# Altium PCB Business_Card.PcbDoc (part 1 of 2)
Units mm, origin at the board's own origin, x right, y up, seen from the top; angles counter-clockwise.
Board outline 85 x 55 mm, 4 copper layers (Top Layer (RF), Inner1 (GND), Inner2 (Signal), Bottom Layer (VCC)), stack 0.786 mm thick; 94 components, 61 nets, 338 pads, 147 vias.
Unrouted connection lines stored in the file: 1.
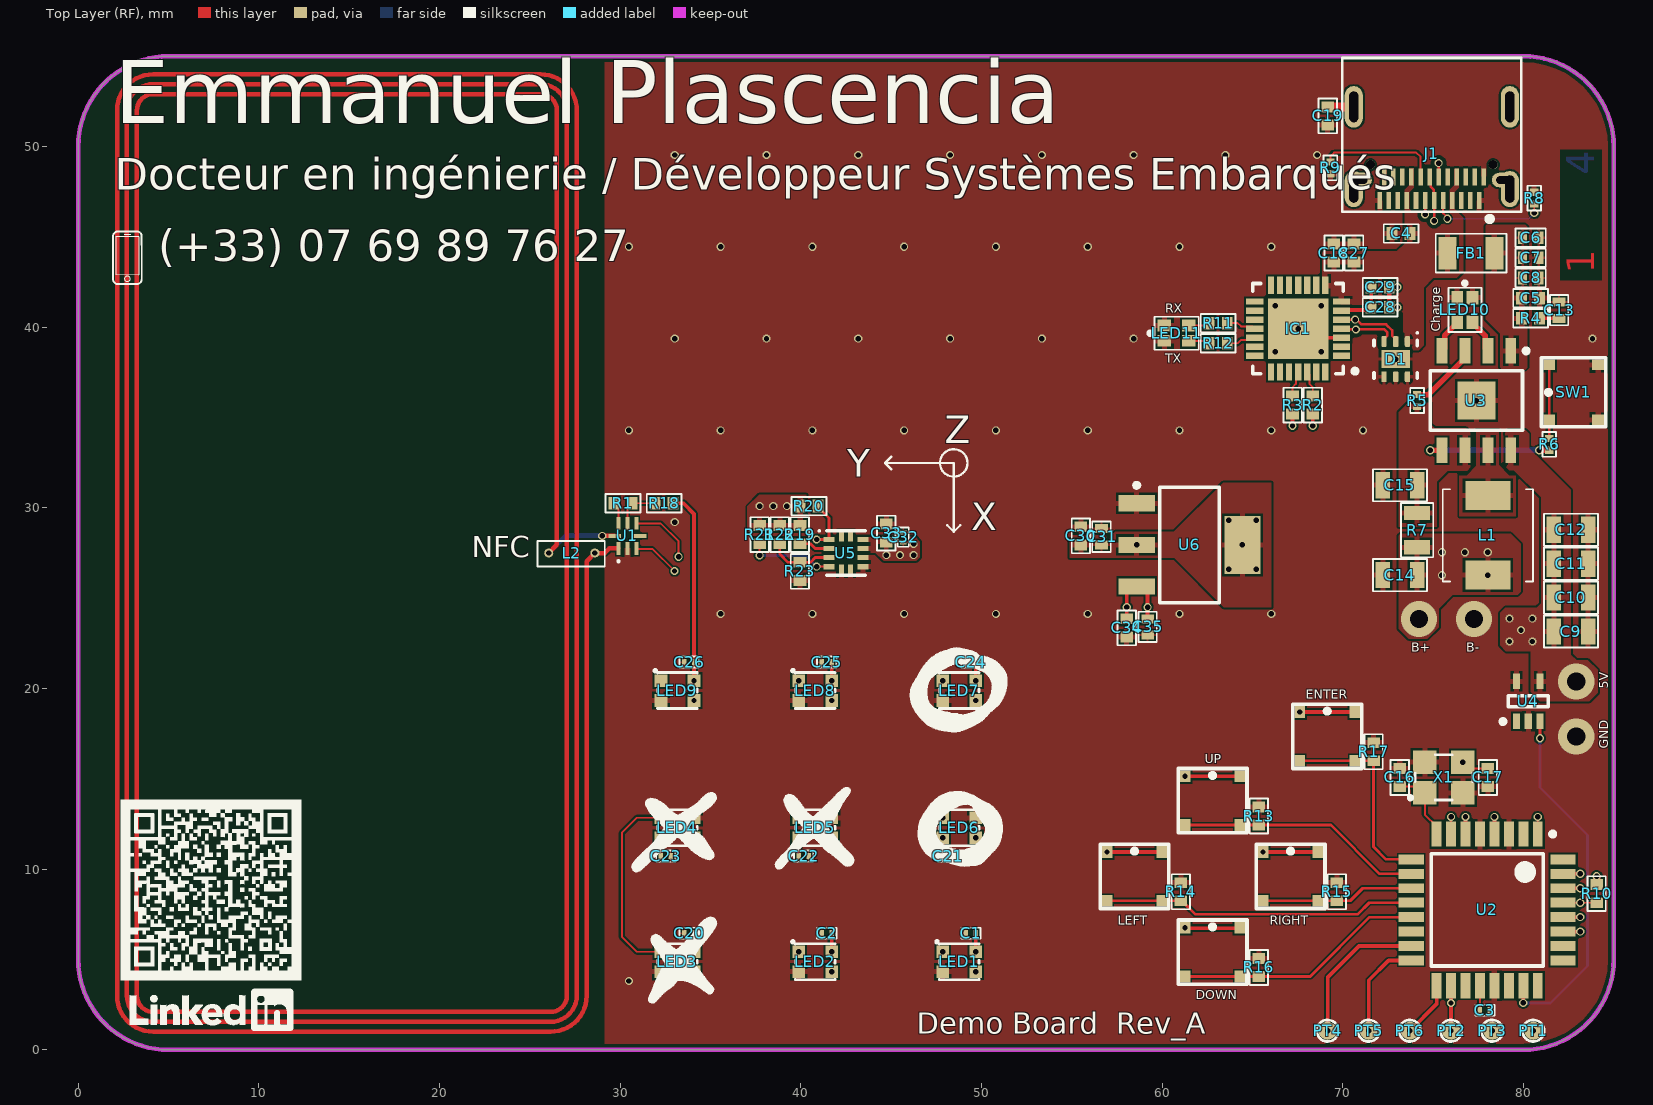
[diagram p0: Top Layer (RF) view]
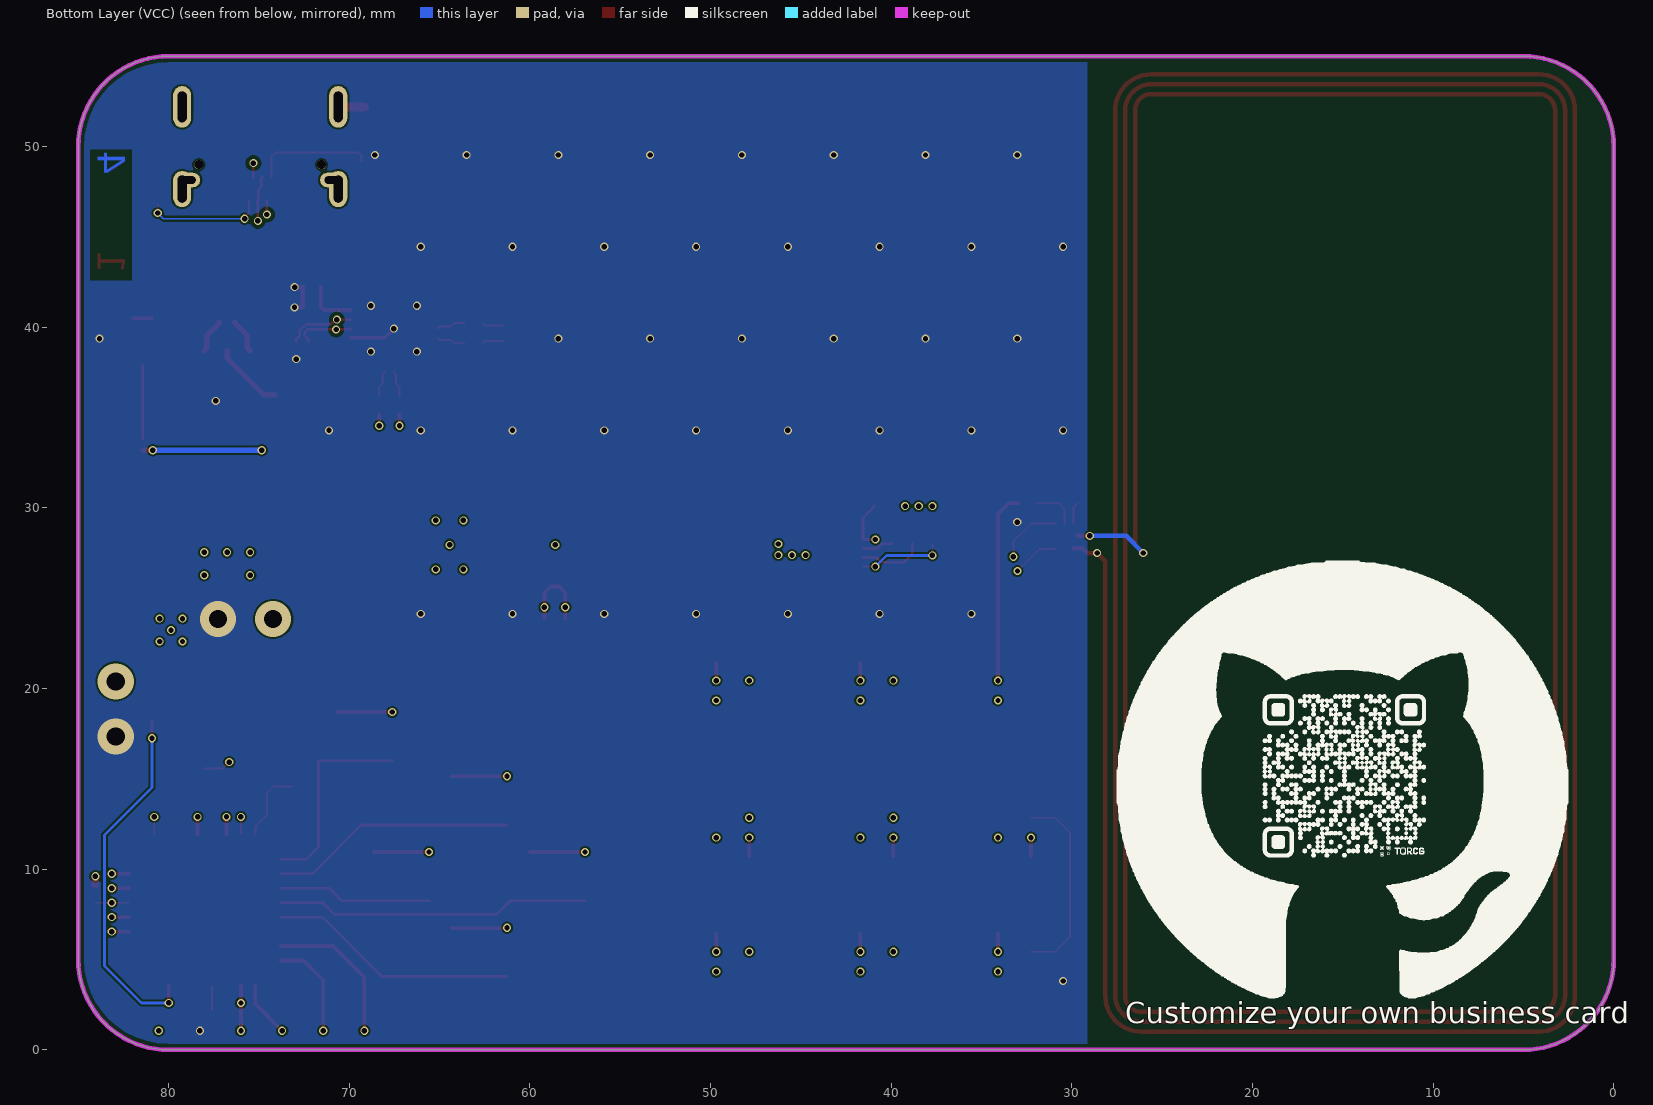
[diagram p1: Bottom Layer (VCC) view, seen from below]
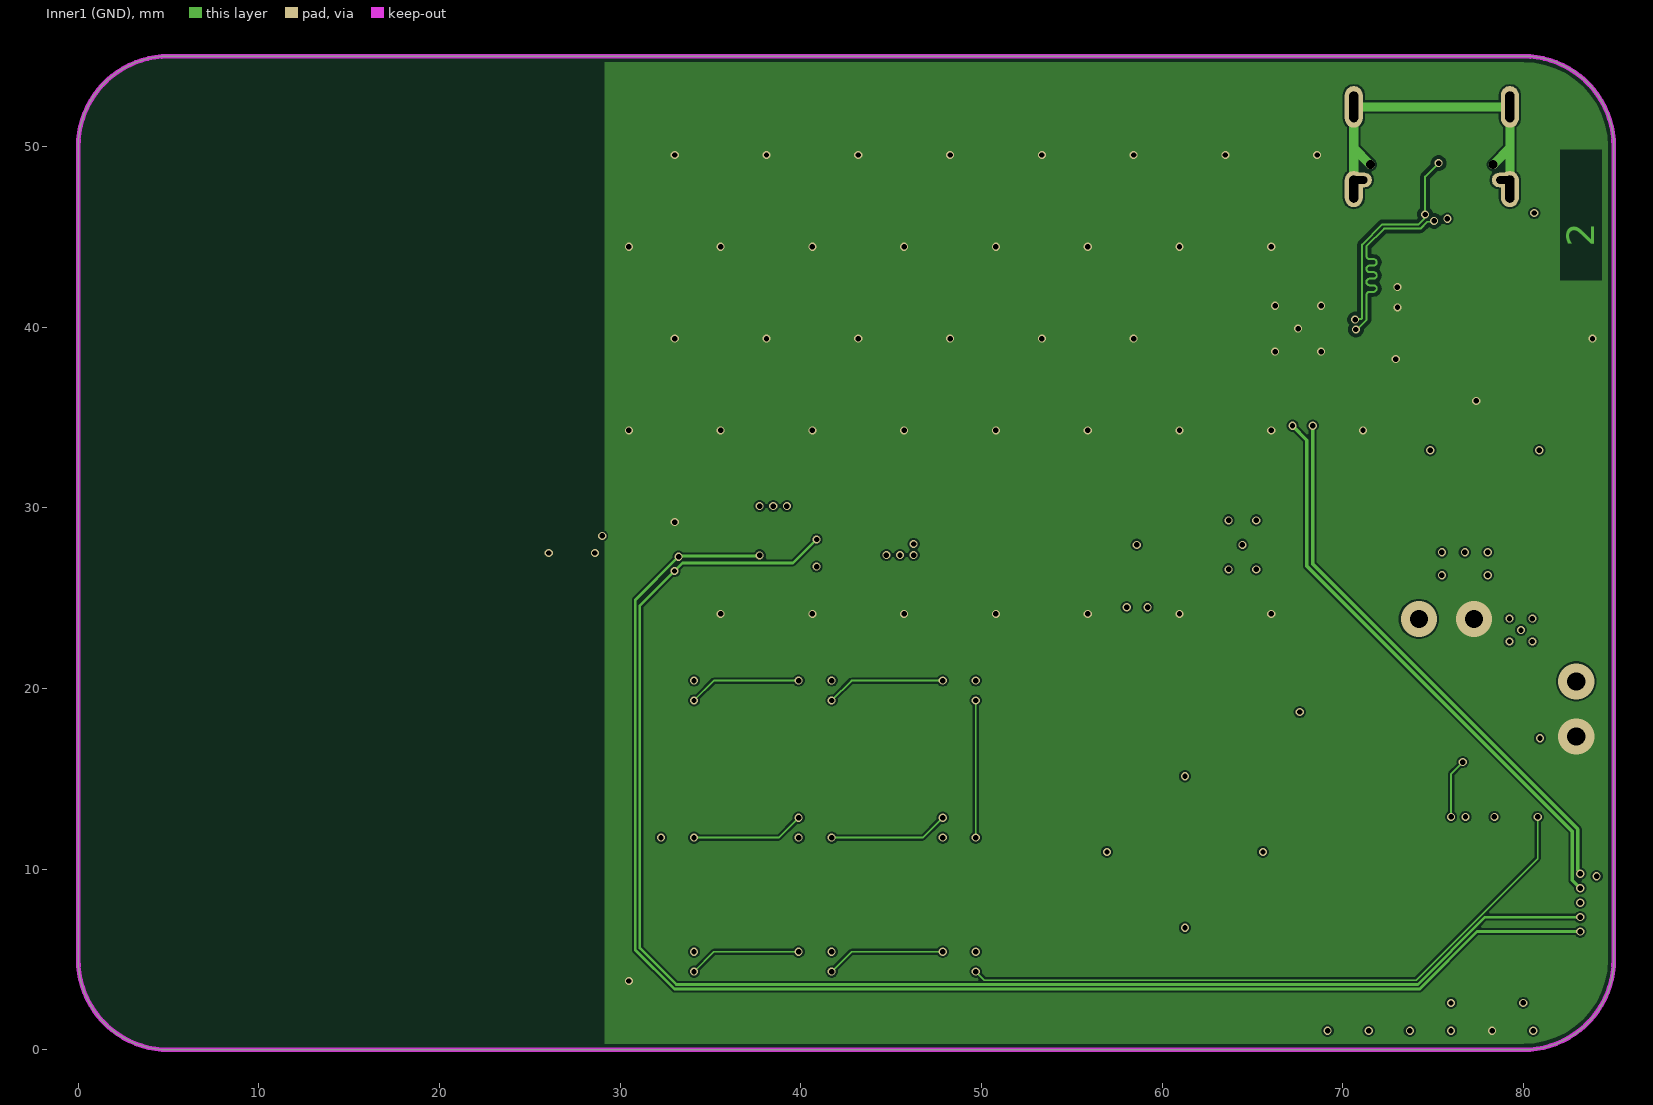
[diagram p2: Inner1 (GND)]
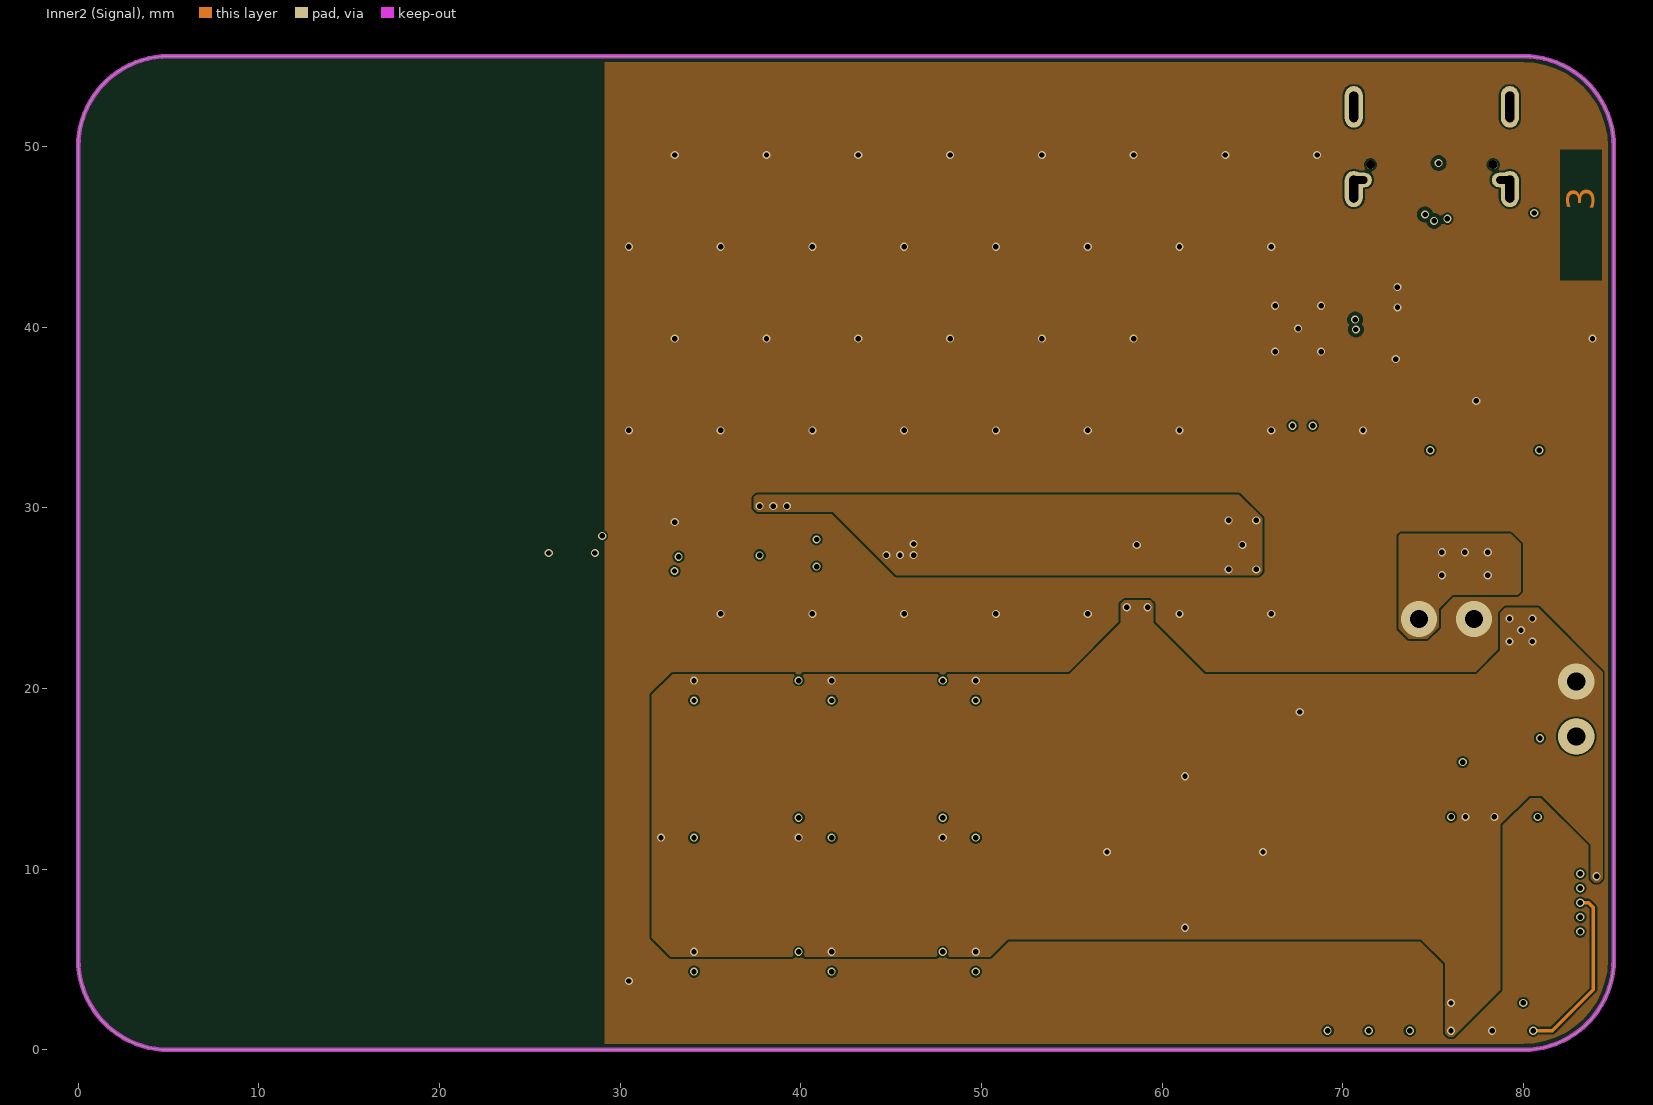
[diagram p3: Inner2 (Signal)]
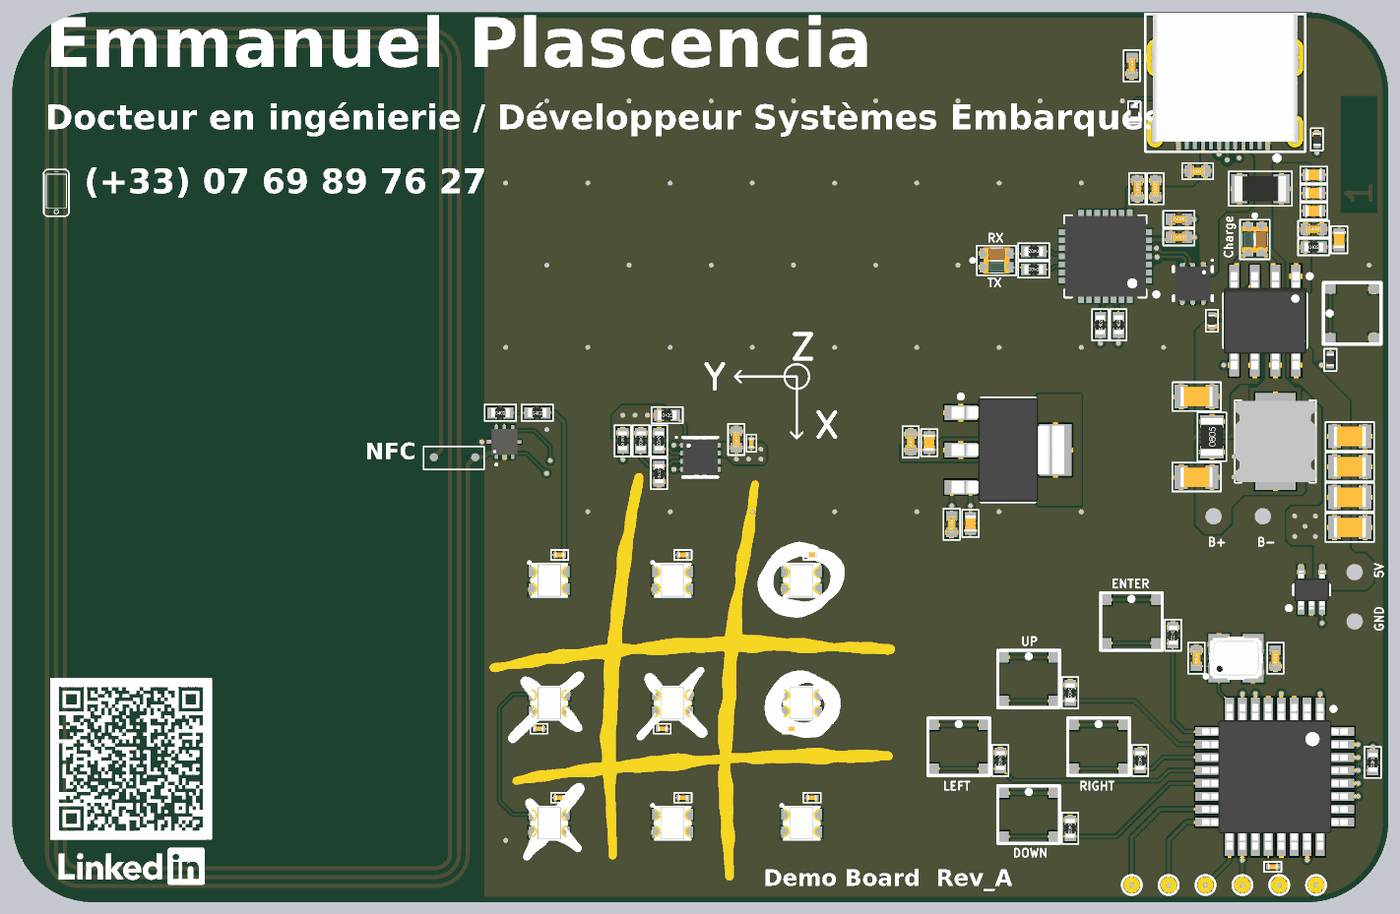
[diagram p5: 3D render of the assembled board from above, using the file's embedded part models]

## Layer stack, top to bottom
Top Solder: solder mask 0.0102, Solder Resist, Dk 3.5
Top Layer (RF): signal copper 0.035
Dielectric 1: prepreg 0.203, PP-006, Dk 4.1
Inner1 (GND): signal copper 0.03
Dielectric 5: core 0.25, Core-009, Dk 4.5
Inner2 (Signal): signal copper 0.03
Dielectric 3: prepreg 0.203, PP-006, Dk 4.1
Bottom Layer (VCC): signal copper 0.035
Bottom Solder: solder mask 0.0102, Solder Resist, Dk 3.5

## Board outline
5,0 cw(c5,5) 0,5 0,50 cw(c5,50) 5,55 80,55 cw(c80,50) 85,50 85,5 cw(c80,5) 80,0

## Design rules (kind name [scope] priority, off if disabled: settings)
BoardOutlineClearance [All] p1: gap=0.102 ignorepadtopadclearanceinfootprint=FALSE except(0: Arc-SplitContinuation Track-SplitContinuation SMDPad-SplitContinuation THPad-SplitContinuation Via-SplitContinuation Fill-SplitContinuation Poly-SplitContinuation Region-SplitContinuation Text-SplitContinuation)
Clearance Clearance_KeepOut [IsKeepOut] p1: gap=0.2 ignorepadtopadclearanceinfootprint=TRUE
Clearance Clearance_Shielding_Nets [InNetClass('Shielding_Nets') vs Not InNetClass('High_Speed_Nets') and Not InAnyDifferentialPair] p2: gap=0.762 ignorepadtopadclearanceinfootprint=TRUE
Clearance Clearance_GNDs [InNet('GND') or InNet('GND_CONN') or InNet('GND_DC') vs InNet('GND') or InNet('GND_CONN') or InNet('GND_DC')] p3: gap=0.508 ignorepadtopadclearanceinfootprint=TRUE
Clearance Clearance_PreAmp_Nets [InNetClass('PreAmp_Nets') vs Not InNetClass('PreAmp_Nets')] p4: gap=0.508 ignorepadtopadclearanceinfootprint=TRUE
Clearance Clearance_HV_Nets [InNetClass('High_Voltage_Nets') vs Not InNetClass('High_Voltage_Nets')] p5: gap=0.508 ignorepadtopadclearanceinfootprint=TRUE
Clearance Clearance_MV_Nets [InNetClass('Medium_Voltage_Nets') vs Not InNetClass('Medium_Voltage_Nets')] p6: gap=0.406 ignorepadtopadclearanceinfootprint=TRUE
Clearance Clearance_HS_Nets [InNetClass('High_Speed_Nets') vs Not InNetClass('High_Speed_Nets')] p7: gap=0.203 ignorepadtopadclearanceinfootprint=TRUE
Clearance [All] p8: gap=0.102 ignorepadtopadclearanceinfootprint=TRUE
ComponentClearance [HasFootprint('SMS-401C_Clip')] p1: gap=0 collisioncheckmode=3 verticalgap=0 showdistances=FALSE
DiffPairsRouting DiffPairsRouting_50ohms [InDifferentialPairClass('DiFf_50ohms')] p1: maxlimit=0.102 minlimit=0.102 mostfreqgap=0.102 toplayer_minwidth=0.675 toplayer_maxwidth=0.675 toplayer_prefwidth=0.675 midlayer2_minwidth=0.626 midlayer2_maxwidth=0.626 midlayer2_prefwidth=0.626 midlayer3_minwidth=0.626 midlayer3_maxwidth=0.626 midlayer3_prefwidth=0.626 bottomlayer_minwidth=0.675 bottomlayer_maxwidth=0.675 bottomlayer_prefwidth=0.675 maxuncoupledlength=0.025
DiffPairsRouting DiffPairsRouting_75ohms [InDifferentialPairClass('Diff_75ohms')] p2: maxlimit=0.102 minlimit=0.102 mostfreqgap=0.102 toplayer_minwidth=0.272 toplayer_maxwidth=0.272 toplayer_prefwidth=0.272 midlayer2_minwidth=0.241 midlayer2_maxwidth=0.241 midlayer2_prefwidth=0.241 midlayer3_minwidth=0.241 midlayer3_maxwidth=0.241 midlayer3_prefwidth=0.241 bottomlayer_minwidth=0.272 bottomlayer_maxwidth=0.272 bottomlayer_prefwidth=0.272 maxuncoupledlength=0.025
DiffPairsRouting DiffPairsRouting_90ohms [InDifferentialPairClass('Diff_90ohms')] p3: maxlimit=0.102 minlimit=0.102 mostfreqgap=0.102 toplayer_minwidth=0.155 toplayer_maxwidth=0.155 toplayer_prefwidth=0.155 midlayer2_minwidth=0.138 midlayer2_maxwidth=0.138 midlayer2_prefwidth=0.138 midlayer3_minwidth=0.138 midlayer3_maxwidth=0.138 midlayer3_prefwidth=0.138 bottomlayer_minwidth=0.155 bottomlayer_maxwidth=0.155 bottomlayer_prefwidth=0.155 maxuncoupledlength=0.025
DiffPairsRouting DiffPairsRouting_100ohms [InDifferentialPairClass('Diff_100ohms')] p4: maxlimit=0.127 minlimit=0.127 mostfreqgap=0.127 toplayer_minwidth=0.137 toplayer_maxwidth=0.137 toplayer_prefwidth=0.137 midlayer2_minwidth=0.109 midlayer2_maxwidth=0.109 midlayer2_prefwidth=0.109 midlayer3_minwidth=0.109 midlayer3_maxwidth=0.109 midlayer3_prefwidth=0.109 bottomlayer_minwidth=0.137 bottomlayer_maxwidth=0.137 bottomlayer_prefwidth=0.137 impedanceprofiledriven=TRUE impedanceprofileid={67C94247-BE4F-40C7-B571-B395B3B95B41} impedanceprofilevalue=100.000000 maxuncoupledlength=0.025
DiffPairsRouting DiffPairsRouting_100ohms_PoE [InDifferentialPairClass('Diff_100ohms_PoE')] p5: maxlimit=0.254 minlimit=0.102 mostfreqgap=0.189 toplayer_mingap=0.189 toplayer_maxgap=0.189 toplayer_minwidth=0.227 toplayer_maxwidth=0.227 toplayer_prefwidth=0.227 midlayer2_prefgap=0.102 midlayer2_minwidth=0.089 midlayer2_maxwidth=0.089 midlayer2_prefwidth=0.089 midlayer3_prefgap=0.102 midlayer3_minwidth=0.089 midlayer3_maxwidth=0.089 midlayer3_prefwidth=0.089 bottomlayer_mingap=0.189 bottomlayer_maxgap=0.189 bottomlayer_minwidth=0.227 bottomlayer_maxwidth=0.227 bottomlayer_prefwidth=0.227 maxuncoupledlength=0.025
DiffPairsRouting [All] p6: maxlimit=0.127 minlimit=0.102 mostfreqgap=0.102 toplayer_minwidth=0.102 toplayer_maxwidth=0.762 toplayer_prefwidth=0.127 midlayer2_minwidth=0.102 midlayer2_maxwidth=0.762 midlayer2_prefwidth=0.127 midlayer3_minwidth=0.102 midlayer3_maxwidth=0.762 midlayer3_prefwidth=0.127 bottomlayer_minwidth=0.102 bottomlayer_maxwidth=0.762 bottomlayer_prefwidth=0.127 maxuncoupledlength=0.025
FanoutControl Fanout_BGA [WithinRoom('BGA')] p1: bgadir=Out bgaviamode=Centered fanoutstyle=BGA fanoutdirection=Alternating viagrid=0.025 // Fanout_BGA (Default Rule)
Height [All] p1: minheight=0 maxheight=50.8 prefheight=12.7
HoleSize [All] p1: absolutevalues=TRUE maxlimit=3.5 minlimit=0.025 maxpercent=80.000 minpercent=20.000
HoleToHoleClearance [All] p1: gap=0.25 allowstackedmicrovias=TRUE
MinimumSolderMaskSliver [All] p1: minsoldermaskwidth=0
PlaneConnect [All] p1: planeconnectstyle=Relief reliefexpansion=0.508 reliefentries=4 reliefconductorwidth=0.305 reliefairgap=0.254
PolygonConnect PolygonConnect_XXS_Pkg [HasFootprint('CAP0201_0.65_0.35') OR HasFootprint('CAP0201_0.7_0.4') OR HasFootprint('RES0201_0.65_0.35') OR HasFootprint('DFN45P60X40-2N')  OR HasFootprint('DFN65P100X55-3N')] p1: connectstyle=Relief reliefconductorwidth=0.102 reliefentries=4 polygonreliefangle="90 Angle" airgapwidth=0.102
PolygonConnect PolygonConnect_XS_Pkg [HasFootprint('CAP0402_1.2*0.7') OR HasFootprint('CAP0402_1.05*0.55') OR HasFootprint('RES0402_1.05*0.55')] p2: connectstyle=Relief reliefconductorwidth=0.152 reliefentries=4 polygonreliefangle="90 Angle" airgapwidth=0.102
PolygonConnect PolygonConnect_S_Pkg [HasFootprint('RES0603_1.6*1') OR HasFootprint('CAP0603_1.6*1') OR HasFootprint('FB0603_1.6*1')] p3: connectstyle=Relief reliefconductorwidth=0.305 reliefentries=4 polygonreliefangle="90 Angle" airgapwidth=0.102
PolygonConnect PolygonConnect_Not_GND [net <> 'GND'] p4: connectstyle=Direct reliefconductorwidth=0.254 reliefentries=4 polygonreliefangle="90 Angle" airgapwidth=0.254
PolygonConnect [All] p5: thpad.connectstyle=Relief thpad.reliefconductorwidth=0.305 thpad.reliefentries=4 thpad.polygonreliefangle="90 Angle" thpad.airgapwidth=0.127 smdpad.connectstyle=Relief smdpad.reliefconductorwidth=0.305 smdpad.reliefentries=4 smdpad.polygonreliefangle="90 Angle" smdpad.airgapwidth=0.127 via.connectstyle=Direct via.reliefconductorwidth=0.305 via.reliefentries=4 via.polygonreliefangle="90 Angle" via.airgapwidth=0.127
RoutingCorners [All] p1: cornerstyle=45-Degree minsetback=1 maxsetback=1
RoutingVias [All] p1: holewidth=0.2 width=0.45 viastyle="Through Hole" minholewidth=0.2 minwidth=0.35 maxholewidth=0.508 maxwidth=1.016
SilkToSilkClearance [All] p1: silktosilkclearance=0.025
SilkToSolderMaskClearance [IsPad] p1: minsilkscreentomaskgap=0 clearancetoexposedcopper=TRUE
SolderMaskExpansion [All] p1: expansion=0.102 istentingtop=FALSE
UnRoutedNet [All] p1: checkbadconnections=TRUE
Width Width_50ohms [InNetClass('Single_50ohms')] p1: maxlimit=0.286 minlimit=0.252 preferedwidth=0.286 toplayer_minwidth=0.286 midlayer2_maxwidth=0.252 midlayer2_prefwidth=0.252 midlayer3_maxwidth=0.252 midlayer3_prefwidth=0.252 bottomlayer_minwidth=0.286 minimp=50.000000 maximp=50.000000 favimp=50.000000
Width [All] p2: maxlimit=2.54 minlimit=0.089 preferedwidth=0.089
18 further rules are at their usual default settings.

## Classes and differential pairs
differential pair class Diff_100ohms: D
differential pair class Diff_75ohms: RX Rx_Rss Rx_Rssb RXa RXb
differential pair class Diff_50ohms: TX TXa TXb TXd
net class High_Speed_Nets: D_N D_P
component class U_OLC_Control: C1 C2 C3 C16 C17 C20 C21 C22 C23 C24 C25 C26 C32 C33 DOWN ENTER L2 LED1 LED2 LED3 LED4 LED5 LED6 LED7 LED8 LED9 LEFT PT1 PT2 PT3 PT4 PT5 PT6 R1 R2 R3 R10 R13 R14 R15 R16 R17 R18 R19 R20 R21 R22 R23 RIGHT U1 U2 U4 U5 UP X1
component class U_DCDC_Converters: C4 C5 C6 C7 C8 C9 C10 C11 C12 C13 C14 C15 C18 C19 C27 C28 C29 C30 C31 C34 C35 D1 FB1 IC1 J1 L1 LED10 LED11 R4 R5 R6 R7 R8 R9 R11 R12 SW1 U3 U6
differential pair D: +D_P -D_N

## Components (designator, comment, footprint, x,y, rotation, side; value= is the part's Value field where it differs from the comment)
C1 "100nF" CAP0201_0.65_0.35 49.408,6.45 r180 top
C2 "100nF" CAP0201_0.65_0.35 41.432,6.45 r180 top
C3 "100nF" CAP0201_0.65_0.35 77.867,2.186 r0 top
C4 "4.7uF" CAP0402 73.228,45.187 r180 top
C5 "4.7uF" CAP0402 80.397,41.607 r0 top
C6 "10uF" CAP0402_1.2*0.7 80.397,44.955 r0 top
C7 "10uF" CAP0402_1.2*0.7 80.397,43.839 r0 top
C8 "10uF" CAP0402_1.2*0.7 80.397,42.723 r0 top
C9 "22uF" CAP0805 82.627,23.154 r0 top
C10 "22uF" CAP0805 82.627,25.032 r0 top
C11 "22uF" CAP0805 82.627,26.91 r0 top
C12 "22uF" CAP0805 82.627,28.788 r0 top
C13 "10uF" CAP0402_1.2*0.7 81.97,40.941 r90 top
C14 "22uF" CAP0805 73.163,26.277 r180 top
C15 "22uF" CAP0805 73.163,31.252 r180 top
C16 "12pF" CAP0402 73.152,15.077 r90 top
C17 "12pF" CAP0402 78.029,15.077 r270 top
C18 "1uF" CAP0402 69.501,44.102 r90 top
C19 "10nF" CAP0402 69.164,51.697 r270 top
C20 "100nF" CAP0201_0.65_0.35 33.812,6.45 r180 top
C21 "100nF" CAP0201_0.65_0.35 48.128,10.72 r0 top
C22 "100nF" CAP0201_0.65_0.35 40.152,10.72 r0 top
C23 "100nF" CAP0201_0.65_0.35 32.532,10.72 r0 top
C24 "100nF" CAP0201_0.65_0.35 49.408,21.461 r180 top
C25 "100nF" CAP0201_0.65_0.35 41.432,21.461 r180 top
C26 "100nF" CAP0201_0.65_0.35 33.812,21.461 r180 top
C27 "100nF" CAP0402 70.619,44.102 r90 top
C28 "100nF" CAP0402 72.067,41.103 r0 top
C29 "4.7uF" CAP0402 72.067,42.221 r0 top
C30 "4.7uF" CAP0402 55.501,28.45 r90 top
C31 "10uF" CAP0402_1.2*0.7 56.644,28.4 r90 top
C32 "100nF" CAP0201_0.65_0.35 45.669,28.375 r90 top
C33 "10uF" CAP0402 44.729,28.6 r90 top
C34 "4.7uF" CAP0402 58.039,23.357 r270 top
C35 "10uF" CAP0402_1.2*0.7 59.193,23.407 r270 top
D1 "TVS0500DRVR" SON65P200X80_HS-7N 72.928,38.232 r270 top
DOWN "TS3735PA 300gf 030" "TS3735PA 300gf 030" 62.789,5.41 r0 top
ENTER "TS3735PA 300gf 030" "TS3735PA 300gf 030" 69.139,17.348 r0 top
FB1 "BLM31KN471SN1L" FB1206_3.4*1.8 77.103,44.101 r0 top
IC1 "CP2102N" PQFN50P500X500X80_HS-29N 67.526,39.918 r180 top
J1 "918-418K2023S40001" HYC91-USBC24-790 74.927,49.592 r0 top
L1 "1µH" IND5030 78.029,28.477 r270 top
L2 "959nH" Antenne 26.045,27.5 r0 top
LED1 "WS2812C-2020-V1" WS2812C-2020 48.768,4.877 r0 top
LED2 "WS2812C-2020-V1" WS2812C-2020 40.792,4.877 r0 top
LED3 "WS2812C-2020-V1" WS2812C-2020 33.172,4.877 r0 top
LED4 "WS2812C-2020-V1" WS2812C-2020 33.172,12.294 r180 top
LED5 "WS2812C-2020-V1" WS2812C-2020 40.792,12.294 r180 top
LED6 "WS2812C-2020-V1" WS2812C-2020 48.768,12.294 r180 top
LED7 "WS2812C-2020-V1" WS2812C-2020 48.768,19.888 r0 top
LED8 "WS2812C-2020-V1" WS2812C-2020 40.792,19.888 r0 top
LED9 "WS2812C-2020-V1" WS2812C-2020 33.172,19.888 r0 top
LED10 "LTST-C195KGJRKT" LED0606_LTST 76.759,40.96 r90 top
LED11 "LTST-C195KGJRKT" LED0606_LTST 60.803,39.668 r180 top
LEFT "TS3735PA 300gf 030" "TS3735PA 300gf 030" 58.471,9.601 r0 top
PT1 "1x Test_point_for_beds_of_nails" "POINT-TEST (Pad 1mm no hole)" 80.544,1.056 r90 top
PT2 "1x Test_point_for_beds_of_nails" "POINT-TEST (Pad 1mm no hole)" 75.99,1.056 r90 top
PT3 "1x Test_point_for_beds_of_nails" "POINT-TEST (Pad 1mm no hole)" 78.267,1.056 r90 top
PT4 "1x Test_point_for_beds_of_nails" "POINT-TEST (Pad 1mm no hole)" 69.159,1.056 r90 top
PT5 "1x Test_point_for_beds_of_nails" "POINT-TEST (Pad 1mm no hole)" 71.436,1.056 r90 top
PT6 "1x Test_point_for_beds_of_nails" "POINT-TEST (Pad 1mm no hole)" 73.713,1.056 r90 top
R1 "0Ω" RES0402 30.154,30.251 r0 top
R2 "1kΩ" RES0402 68.334,35.687 r90 top
R3 "1kΩ" RES0402 67.217,35.687 r90 top
R4 "2Ω" RES0402 80.397,40.491 r0 top
R5 "1kΩ" RES0201 74.113,35.941 r90 top
R6 "10kΩ" RES0201 81.429,33.518 r90 top
R7 "500mΩ" RES0805 74.113,28.764 r90 top
R8 "5.1kΩ" RES0201 80.597,47.149 r90 top
R9 "5.1kΩ" RES0201 69.317,48.82 r270 top
R10 "10kΩ" RES0402 84.049,8.643 r270 top
R11 "1kΩ" RES0402 63.102,40.227 r180 top
R12 "1kΩ" RES0402 63.102,39.109 r180 top
R13 "1kΩ" RES0402 65.354,12.942 r270 top
R14 "1kΩ" RES0402 61.036,8.751 r270 top
R15 "1kΩ" RES0402 69.672,8.751 r270 top
R16 "1kΩ" RES0402 65.354,4.56 r270 top
R17 "1kΩ" RES0402 71.704,16.498 r270 top
R18 "0Ω" RES0402 32.432,30.251 r0 top
R19 "0Ω" RES0402 39.951,28.515 r270 top
R20 "2.2kΩ" RES0402 40.451,30.099 r0 top
R21 "2.2kΩ" RES0402 37.719,28.515 r270 top
R22 "100kΩ" RES0402 38.835,28.515 r270 top
R23 "0Ω" RES0402 39.951,26.485 r90 top
RIGHT "TS3735PA 300gf 030" "TS3735PA 300gf 030" 67.107,9.601 r0 top
SW1 "TS3735PA 300gf 030" "TS3735PA 300gf 030" 82.779,36.394 r90 top
U1 "NT3H2111W0FHK" QFN8P50_160X160X50L40X20N 30.404,28.448 r90 top
U2 "ATMEGA328PB-AU" TQFP80P900X900X120-32N 77.992,7.743 r270 top
U3 "IP5306" SOP127P600X165_HS-9N 77.394,35.941 r270 top
U4 "LM20CIM7X" SOT65P210X110-5N 80.265,19.296 r90 top
U5 "LIS2DH12TR" SON50P200X100-8N 42.5,27.5 r0 top
U6 "AMS1117-3.3" SOT230P696X180-4N 61.519,27.95 r0 top
UP "TS3735PA 300gf 030" "TS3735PA 300gf 030" 62.789,13.792 r0 top
X1 "16MHz" CRYSTAL_3.2mmX2.5mm_2 75.591,15.077 r0 top

## Footprints (in the part's own frame and the unit in brackets; to place one, negate y for a bottom-side part, rotate by r counter-clockwise, add the part's x,y. Pads: shape width x height; smd on the part's side, far side on the other; paste and mask are expansions set on the pad)
Antenne [mm] "53x26 mm 0.25mm w 0.3mm g"
  round 0.5 smd mask+0.05: 1(2.555,0) 2(0,0)
  Top Layer (RF) lines w0.25: 0,0 0.453,0.453 0.453,24.5 ccw(c-0.447,24.5) -0.447,25.4 -21.897,25.4 ccw(c-21.897,24.5) -22.797,24.5 -22.797,-24.5 ccw(c-21.897,-24.5) -21.897,-25.4 0.103,-25.4 ccw(c0.103,-24.5) 1.003,-24.5 ; 2.555,0 2.103,-0.453 2.103,-24.5 cw(c0.103,-24.5) 0.103,-26.5 -21.897,-26.5 cw(c-21.897,-24.5) -23.897,-24.5 -23.897,24.5 cw(c-21.897,24.5) -21.897,26.5 -0.447,26.5 cw(c-0.447,24.5) 1.553,24.5 1.553,-24.5 cw(c0.103,-24.5) 0.103,-25.95 -21.897,-25.95 cw(c-21.897,-24.5) -23.347,-24.5 -23.347,24.5 cw(c-21.897,24.5) -21.897,25.95 -0.447,25.95 cw(c-0.447,24.5) 1.003,24.5 1.003,-24.5 ; 1.003,-24.5 1.003,-24.5
  silkscreen extent -0.63,-0.75 3.1,0.66
CAP0201_0.65_0.35 [mm] "Chip Capacitor, 2-Leads, Body 0.60x0.30mm, IPC Medium Density"
  rect 0.25x0.35 smd mask+0.05: 1(-0.275,0) 2(0.275,0)
  silkscreen extent -0.53,-0.3 0.53,0.3, body extent -0.3,-0.15 0.3,0.15, height 0.2
CAP0402 [mm]
  rect 0.6x0.7 smd mask+0.05: 1(-0.5,0) 2(0.5,0)
  silkscreen extent -0.97,-0.51 0.97,0.51, body extent -0.51,-0.25 0.51,0.25, height 0.51
CAP0402_1.2*0.7 [mm]
  rect 0.5x0.7 smd mask+0.05: 1(-0.45,0) 2(0.45,0)
  silkscreen extent -0.84,-0.51 0.84,0.51, body extent -0.5,-0.32 0.5,0.33, height 0.53
CAP0805 [mm]
  rect 0.8x1.45 smd mask+0.05: 1(-0.95,0) 2(0.95,0)
  silkscreen extent -1.5,-0.89 1.5,0.89, body extent -1,-0.62 1,0.63, height 1.25
CRYSTAL_3.2mmX2.5mm_2 [mm]
  rect 1.3x1.3 smd mask+0.05: 1(-1.05,-0.85) 2(1.05,-0.85) 3(1.05,0.85) 4(-1.05,0.85)
  silkscreen extent -1.95,-1.25 1.6,1.25, body extent -1.6,-1.25 1.6,1.25, height 0.82
FB1206_3.4*1.8 [mm]
  rect 1x1.8 smd mask+0.05: 1(-1.3,0) 2(1.3,0)
  silkscreen extent -1.96,-1.07 1.96,1.07, body extent -1.6,-0.8 1.6,0.8, height 1.1
HYC91-USBC24-790 [mm]
  rrect1% 0.25x0.95 smd mask+0.05: A1(2.625,-2.57) A2(2.125,-2.57) A3(1.625,-2.57) A4(1.125,-2.57) A5(0.625,-2.57) A6(0.125,-2.57) A7(-0.375,-2.57) A8(-0.875,-2.57) A9(-1.375,-2.57) A10(-1.875,-2.57) A11(-2.375,-2.57) A12(-2.875,-2.57) B1(-2.625,-1.27) B2(-2.125,-1.27) B3(-1.625,-1.27) B4(-1.125,-1.27) B5(-0.625,-1.27) B6(-0.125,-1.27) B7(0.375,-1.27) B8(0.875,-1.27) B9(1.375,-1.27) B10(1.875,-1.27) B11(2.375,-1.27) B12(2.875,-1.27)
  oval 1.5x0.806 hole 0.4 slot 1 at 0 deg mask+0.05: SH1(4.07,-1.445) SH2(-4.07,-1.445)
  oval 1x2 hole 0.5 slot 1.5 at 90 deg mask+0.05: SH1(4.32,-1.945) SH2(-4.32,-1.945)
  oval 1x2.3 hole 0.5 slot 1.7 at 90 deg mask+0.05: SH3(4.32,2.605) SH4(-4.32,2.605)
  round 0.5 hole 0.5 mask+0.05: SH5(3.4,-0.595) SH6(-3.4,-0.595)
  silkscreen extent -4.95,-3.74 4.95,5.31, body extent -4.47,-2.59 4.47,5.31, height 3.19
IND5030 [mm]
  rect 1.6x2.5 smd mask+0.07: 1(-2.2,0) 2(2.2,0)
  silkscreen extent -2.55,-2.5 2.55,2.5, body extent -2.5,-2.5 2.5,2.5, height 2.8
LED0606_LTST [mm] "0606 Package (Bicolore LED)"
  rect 0.75x0.65 smd mask+0.05: 1(-0.675,0.425) 2(-0.675,-0.425) 3(0.675,0.425) 4(0.675,-0.425)
  silkscreen extent -1.22,-0.91 1.57,0.91, body extent -0.8,-0.8 0.8,0.8, height 0.6
"POINT-TEST (Pad 1mm no hole)" [mm]
  round 1 smd paste-2 mask+0.05: 1(0,0)
  silkscreen extent -0.6,-0.6 0.6,0.6
PQFN50P500X500X80_HS-29N [mm] "PQFN, 28-Leads, Body 5.00x5.00mm, Pitch 0.50mm, Thermal Pad 3.25x3.25mm, IPC Medium Density"
  rect 0.95x0.35 smd mask+0.01: 1(-2.4,1.5) 2(-2.4,1) 3(-2.4,0.5) 4(-2.4,0) 5(-2.4,-0.5) 6(-2.4,-1) 7(-2.4,-1.5) 15(2.4,-1.5) 16(2.4,-1) 17(2.4,-0.5) 18(2.4,0) 19(2.4,0.5) 20(2.4,1) 21(2.4,1.5)
  rect 0.35x0.95 smd mask+0.01: 8(-1.5,-2.4) 9(-1,-2.4) 10(-0.5,-2.4) 11(0,-2.4) 12(0.5,-2.4) 13(1,-2.4) 14(1.5,-2.4) 22(1.5,2.4) 23(1,2.4) 24(0.5,2.4) 25(0,2.4) 26(-0.5,2.4) 27(-1,2.4) 28(-1.5,2.4)
  rect 3.35x3.35 smd mask+0.01: 29(0,0)
  silkscreen extent -3.27,-2.5 2.5,2.5, body extent -2.5,-2.5 2.5,2.5, height 0.8
QFN8P50_160X160X50L40X20N [mm]
  rect 0.71x0.22 smd mask+0.05: 1(-0.695,0.5) 2(-0.695,0)
  rect 0.7x0.22 smd mask+0.05: 3(-0.695,-0.5) 5(0.695,-0.5) 6(0.695,0) 7(0.695,0.5)
  rect 0.22x0.7 smd mask+0.05: 4(0,-0.695) 8(0,0.695)
  silkscreen extent -1.42,0.48 -1.38,0.52, body extent -0.8,-0.8 0.8,0.8, height 0.5
RES0201 [mm] "Chip Resistor, 2-Leads, Body 0.60x0.30mm, IPC Medium Density"
  rect 0.4x0.45 smd mask+0.05: 1(-0.327,0) 2(0.327,0)
  silkscreen extent -0.69,-0.38 0.69,0.38, body extent -0.38,-0.22 0.38,0.22, height 0.26
RES0402 [mm]
  rect 0.6x0.7 smd mask+0.05: 1(-0.5,0) 2(0.5,0)
  silkscreen extent -0.97,-0.51 0.97,0.51, body extent -0.57,-0.27 0.58,0.28, height 0.41
RES0805 [mm]
  rect 0.8x1.45 smd mask+0.05: 1(-0.95,0) 2(0.95,0)
  silkscreen extent -1.5,-0.89 1.5,0.89, body extent -1.15,-0.67 1.15,0.68, height 0.76
SON50P200X100-8N [mm] "SON, 8-Leads, Body 2.00x2.00mm, Pitch 0.50mm, IPC Medium Density"
  rect 0.6x0.3 smd mask+0.01: 1(-0.937,0.75) 2(-0.937,0.25) 3(-0.937,-0.25) 4(-0.937,-0.75) 7(0.937,-0.75) 8(0.937,-0.25) 9(0.937,0.25) 10(0.937,0.75)
  rect 0.3x0.6 smd mask+0.01: 5(-0.25,-0.937) 6(0.25,-0.937) 11(0.25,0.937) 12(-0.25,0.937)
  silkscreen extent -1.52,-1.22 1.07,1.27, body extent -1.07,-1.07 1.07,1.07, height 1
SON65P200X80_HS-7N [mm] "SON, 6-Leads, Body 2.00x2.00mm, Pitch 0.65mm, Thermal Pad 1.60x0.89mm, IPC Medium Density"
  rrect50% 0.6x0.3 smd mask+0.05: 1(-0.975,0.65) 2(-0.975,0) 3(-0.975,-0.65) 4(0.975,-0.65) 5(0.975,0) 6(0.975,0.65)
  rect 1x1.6 smd mask+0.05: 7(0,0)
  silkscreen extent -1.5,-1.2 1.05,1.25, body extent -1.05,-1.05 1.05,1.05, height 0.8
SOP127P600X165_HS-9N [mm] "SOP, 8-Leads, Body 4,90x3,90mm, Pitch 1,27mm, Thermal Pad 2,09x2,09mm, IPC Medium Density"
  rect 1.4x0.6 smd: 1(-2.75,1.905) 2(-2.75,0.635) 3(-2.75,-0.635) 4(-2.75,-1.905) 5(2.75,-1.905) 6(2.75,-0.635) 7(2.75,0.635) 8(2.75,1.905)
  rect 2.09x2.09 smd: 9(0,0)
  silkscreen extent -2.87,-2.55 1.65,2.88, body extent -3,-2.55 3,2.55, height 1.65
SOT65P210X110-5N [mm] "SOT23, 5-Leads, Body 2.00x2.10mm, Pitch 0.65mm, IPC Medium Density"
  rect 0.85x0.4 smd mask+0.05: 1(-1.1,0.65) 2(-1.1,0) 3(-1.1,-0.65) 4(1.1,-0.65) 5(1.1,0.65)
  silkscreen extent -1.25,-1.1 0.3,1.52, body extent -1.2,-1.07 1.2,1.07, height 1.1
SOT230P696X180-4N [mm] "SOT223, 4-Leads, Body 6,30x6,97mm (avg), Pitch 2,30mm, IPC Medium Density"
  rect 2x0.9 smd: 1(-2.925,2.3) 2(-2.925,0) 3(-2.925,-2.3)
  rect 2x3.2 smd: 2(2.925,0)
  silkscreen extent -3.05,-3.2 1.65,3.42, body extent -3.48,-3.2 3.48,3.2, height 1.8
TQFP80P900X900X120-32N [mm] "TQFP, 32-Leads, Body 7.00x7.00mm, Pitch 0.80mm, IPC Medium Density"
  rect 1.4x0.55 smd: 1(-4.2,2.8) 2(-4.2,2) 3(-4.2,1.2) 4(-4.2,0.4) 5(-4.2,-0.4) 6(-4.2,-1.2) 7(-4.2,-2) 8(-4.2,-2.8) 17(4.2,-2.8) 18(4.2,-2) 19(4.2,-1.2) 20(4.2,-0.4) 21(4.2,0.4) 22(4.2,1.2) 23(4.2,2) 24(4.2,2.8)
  rect 0.55x1.4 smd: 9(-2.8,-4.2) 10(-2,-4.2) 11(-1.2,-4.2) 12(-0.4,-4.2) 13(0.4,-4.2) 14(1.2,-4.2) 15(2,-4.2) 16(2.8,-4.2) 25(2.8,4.2) 26(2,4.2) 27(1.2,4.2) 28(0.4,4.2) 29(-0.4,4.2) 30(-1.2,4.2) 31(-2,4.2) 32(-2.8,4.2)
  silkscreen extent -4.32,-3.1 3.1,3.75, body extent -4.5,-4.5 4.5,4.5, height 1.2
"TS3735PA 300gf 030" [mm] "Tactile Switch SPST 300gf Surface Mount"
  rect 0.6x0.65 smd mask+0.05: 1(-1.525,1.35) 1(1.525,1.35) 2(-1.525,-1.35) 2(1.525,-1.35)
  silkscreen extent -1.91,-1.78 1.91,1.78
WS2812C-2020 [mm] "RGB LED"
  rect 0.7x0.7 smd mask+0.038: 1(-0.915,0.55) 2(-0.915,-0.55) 3(0.915,-0.55) 4(0.915,0.55)
  silkscreen extent -1.3,-1 1.1,1.17, body extent -1.1,-1 1.1,1, height 0.86

## Part data
C1 C2 C3 C20 C21 C22 C23 C24 C25 C26 C32: library part C0201_100nF_10V_X5R, "Capacitor ceramic MLCC - SMD 0201 100nF, 10V, X5R, 10%", Fabricant="Murata Electronics", Fournisseur=LCSC, Help URL=https://lcsc.com/product-detail/Multilayer-Ceramic-Capacitors-MLCC-SMD-SMT_Murata-Electronics-GRM033R61A104KE15D_C76934.html, Ref Fabricant=GRM033R61A104KE15D, Ref Fournisseur=C76934, Unit Price=0.002, Unit Price(10)=0.002, Unit Price(100)=0.002, Unit Price(10000)=0.0015
C4 C5 C29 C30 C34: library part C0402_4.7uF_6V3_X5R, "Capacitor ceramic MLCC - SMD 0402 4.7uF, 6V3, X5R, 20%", Fabricant="Samsung Electro-Mechanics", Fournisseur=LCSC, Help URL=https://datasheet.lcsc.com/szlcsc/1810231822_Samsung-Electro-Mechanics-CL05A475MQ5NRNC_C307423.pdf, Ref Fabricant=CL05A475MQ5NRNC, Ref Fournisseur=C307423, Unit Price=0.0041, Unit Price(10)=0.0041, Unit Price(50)=0.0041, Unit Price(100)=0.0041, Unit Price(500)=0.003, Unit Price(1000)=0.003, Unit Price(1500)=0.0028, Unit Price(5000)=0.0026, Unit Price(25000)=0.0025, Unit Price(50000)=0.0024
C6 C7 C8 C13 C31 C35: library part C0402_10uF_6V3_X5R_, "Capacitor ceramic MLCC - SMD 0402 10uF, 6V3, X5R, 20%", Fabricant="Samsung Electro-Mechanics", Fournisseur=LCSC, Help URL=https://datasheet.lcsc.com/szlcsc/1810191215_Samsung-Electro-Mechanics-CL05A106MQ5NUNC_C15525.pdf, Ref Fabricant=CL05A106MQ5NUNC, Ref Fournisseur=C15525, Unit Price=0.0068, Unit Price(10)=0.0068, Unit Price(50)=0.0068, Unit Price(100)=0.0068, Unit Price(500)=0.0052, Unit Price(1000)=0.0052, Unit Price(1500)=0.0049, Unit Price(5000)=0.0044, Unit Price(25000)=0.0041, Unit Price(50000)=0.004
C9 C10 C11 C12 C14 C15: library part C0805_22uF_10V_X7T, "Capacitor ceramic MLCC - SMD 0805 22uF, 10V, X7T, 20%", Fabricant=Murata, Fournisseur=LCSC, Help URL=https://datasheet.lcsc.com/lcsc/2001041604_Murata-Electronics-GRM21BD71A226ME44L_C385042.pdf, Ref Fabricant=GRM21BD71A226ME44L, Ref Fournisseur=C385042, Unit Price=0.2147, Unit Price(10)=0.1846, Unit Price(30)=0.1627, Unit Price(100)=0.0840, Unit Price(500)=0.0822, Unit Price(1000)=0.0813
C16 C17: library part "C0402_12pF_50V_C0G (NP0)", "Capacitor ceramic MLCC - SMD 0402 12pF, 50V, C0G (NP0), 20%", Fabricant=Yageo, Fournisseur=LCSC, Help URL=https://www.mouser.fr/ProductDetail/YAGEO/CC0402JRNPO9BN120?qs=%2Fha2pyFadugad28DmURO4f8iWSv%252BQnq1zQRrAWNTY3HHadEPskU8GA%3D%3D, Ref Fabricant=CC0402JRNPO9BN120, Ref Fournisseur=C106201, Unit Price=0.0013, Unit Price(10)=0.0013, Unit Price(100)=0.0013, Unit Price(1000)=0.001, Unit Price(10000)=0.0009, Unit Price(100000)=0.0008
C18: library part C0402_1uF_10V_X7R, "Capacitor ceramic MLCC - SMD 0402 1uF, 10V, X7R, 10%", Fabricant=Murata, Fournisseur=Mouser, Help URL=https://www.mouser.fr/ProductDetail/Murata-Electronics/GRM155Z71A105KE01J?qs=xZ%2FP%252Ba9zWqaF%2FmyRgV0iOA%3D%3D, Ref Fabricant=GRM155Z71A105KE01J, Ref Fournisseur=81-GRM155Z71A105KE1J, Unit Price=0,102, Unit Price(10)=0,072, Unit Price(50)=0,072, Unit Price(100)=0,034, Unit Price(500)=0,024, Unit Price(1000)=0,02, Unit Price(1500)=0,02, Unit Price(5000)=0,017, Unit Price(25000)=0,016
C19: library part C0402_10nF_50V_X7R, "Capacitor ceramic MLCC - SMD 0402 10nF, 50V, X7R, 10%", Fabricant=Yageo, Fournisseur=LCSC, Help URL=https://datasheet.lcsc.com/lcsc/1810200014_YAGEO-CC0402KRX7R9BB103_C60133.pdf, Ref Fabricant=CC0402KRX7R9BB103, Ref Fournisseur=C60133, Unit Price=0.001, Unit Price(10)=0.001, Unit Price(100)=0.001, Unit Price(1000)=0.0008, Unit Price(3000)=0.0007, Unit Price(10000)=0.0006, Unit Price(50000)=0.0005
C27 C28: library part C0402_100nF_100V_X5R, "Capacitor ceramic MLCC - SMD 0402 100nF, 100V, X5R, 20%", Fabricant=YAGEO, Fournisseur=LCSC, Help URL=https://datasheet.lcsc.com/lcsc/1811131731_YAGEO-CC0402KRX5R9BB104_C105882.pdf, Ref Fabricant=CC0402KRX5R9BB104, Ref Fournisseur=C105882, Unit Price=0.0024, Unit Price(10)=0.0024, Unit Price(100)=0.0024, Unit Price(1000)=0.0019, Unit Price(3000)=0.0016, Unit Price(10000)=0.0015, Unit Price(50000)=0.0013
C33: library part C0402_10uF_10V_X5R, "Capacitor ceramic MLCC - SMD 0402 10uF, 10V, X5R, 20%", Fabricant="Samsung Electro-Mechanics", Fournisseur=LCSC, Help URL=https://datasheet.lcsc.com/lcsc/2007131004_Samsung-Electro-Mechanics-CL05A106MP5NUNC_C315248.pdf, Ref Fabricant=CL05A106MP5NUNC, Ref Fournisseur=C315248, Unit Price=0.011, Unit Price(10)=0.011, Unit Price(50)=0.011, Unit Price(100)=0.011, Unit Price(500)=0.009, Unit Price(1000)=0.009, Unit Price(1500)=0.0079, Unit Price(10000)=0.0065, Unit Price(20000)=0.006, Unit Price(50000)=0.0057
D1: "27.7VC Clamp 40A@8/20us Ipp TVS DIODE WSON-6-EP(2x2)", Fabricant="Texas instruments", Fournisseur=LCSC, Help URL=https://www.ti.com/lit/ds/symlink/tvs0500.pdf?ts=1776012452748, Ref Fabricant=TVS0500DRVR, Ref Fournisseur=C609571, Unit Price=0.4117, Unit Price(10)=0.3255, Unit Price(100)=0.2457, Unit Price(1000)=0.2298
DOWN ENTER LEFT RIGHT SW1 UP: "Tactile Switch SPST 300gf Surface Mount", Fabricant="SHOU HAN", Fournisseur=LCSC, Help URL=https://www.lcsc.com/datasheet/C5363478.pdf?spm=wm.sxq.inf.ggs___wm.fly.bg.6.xh&lcsc_vid=FgJXV1VSRgJaVwUHEgQNVVQEQlFXBl0FFVhdUwYFRgUxVlNRQVFXUV1QRVlXXjsOAxUeFF5JWBYZEEoKFBINSQcJGk4NBhADEA4cHktQQ1NADxALGw%3D%3D, Ref Fabricant="TS3735PA 300gf 030", Ref Fournisseur=C5363478, Unit Price=0.0188, Unit Price(50)=0.0188, Unit Price(500)=0.0147, Unit Price(1500)=0.0125
FB1: library part FB1206_470Z_20mR_4A, "Ferrite Bead SMD 1206, 470Z, 20mΩ, 4A, 25%", Fabricant="Murata Electronics", Fournisseur=LCSC, Help URL=https://www.mouser.fr/datasheet/2/281/c31e-794748.pdf, Ref Fabricant=BLM31KN471SN1L, Ref Fournisseur=C703117, Unit Price=0.1323, Unit Price(10)=0.0962, Unit Price(30)=0.0896, Unit Price(100)=0.083, Unit Price(500)=0.08, Unit Price(1000)=0.0786
IC1: "USB to UART USB 2.0 QFN-28-EP(5x5) Interface Controllers RoHS", Fabricant="Silicon Labs", Fournisseur=LCSC, Help URL=https://www.lcsc.com/datasheet/C964632.pdf?spm=wm.sxq.inf.ggs___wm.fly.bg.1.xh&lcsc_vid=FgJXV1VSRgJaVwUHEgQNVVQEQlFXBl0FFVhdUwYFRgUxVlNRQVFWUVdQQllYUjsOAxUeFF5JWBYZEEoKFBINSQcJGk4dAgUUFAk%3D, Ref Fabricant=CP2102N-A02-GQFN28R, Ref Fournisseur=C964632, Unit Price=1.58, Unit Price(10)=1.3771, Unit Price(100)=1.1014
J1: "USB 2.0 F type C, SMD", Fabricant="Jing Extension of the Electronic Co.", Fournisseur=LCSC, Help URL=http://www.dzyjzj.com/Uploads/Product/USB%20TYPE%20C%203.1%20%E5%9B%9B%E8%84%9A%E6%8F%92%E6%9D%BF%20%E5%8F%8C%E6%8E%92SMT%20%E6%9C%89%E6%9F%B1%E6%97%A0%E5%87%B8%E5%8C%85/USB%20TYPE%20C%203.1%20%E5%9B%9B%E8%84%9A%E6%8F%92%E6%9D%BF%20%E5%8F%8C%E6%8E%92SMT%20%E6%9C%89%E6%9F%B1%E6%97%A0%E5%87%B8%E5%8C%85%E5%B7%A5%E7%A8%8B%E5%9B%BE.jpg, Ref Fabricant=918-418K2023S40001, Ref Fournisseur=C167321, Unit Price=0.3539, Unit Price(10)=0.2788, Unit Price(30)=0.265, Unit Price(100)=0.2512, Unit Price(500)=0.2451, Unit Price(1000)=0.242
L1: library part IND5030_1µH_10.5mR_8.5A, "8.5A 1uH ±20% 8.5A 10.5mΩ SMD,5.2x5.7mm Inductors (SMD) ROHS", Fabricant=KOHERelec, Fournisseur=LCSC, Help URL=https://datasheet.lcsc.com/lcsc/2109101630_KOHERelec-MDA5030-1R0M_C2847474.pdf, Ref Fabricant=MDA5030-1R0M, Ref Fournisseur=C2847474, Unit Price=0.5514, Unit Price(10)=0.4595, Unit Price(100)=0.3677, Unit Price(1000)=0.2924
L2: library part Antenne, "959nH 1.6pF 1.36ohm 128MHz"
LED1 LED2 LED3 LED4 LED5 LED6 LED7 LED8 LED9: "Intelligent external control integrated LED - CMS RGB, 2020", Fabricant=Worldsemi, Fournisseur=LCSC, Help URL=https://datasheet.lcsc.com/lcsc/2202221130_Worldsemi-WS2812C-2020-V1_C2976072.pdf, Ref Fabricant=WS2812C-2020-V1, Ref Fournisseur=C2976072, Unit Price=0.0893, Unit Price(5)=0.0893, Unit Price(10)=0.0893, Unit Price(50)=0.0736, Unit Price(100)=0.0736, Unit Price(150)=0.0658, Unit Price(500)=0.0599, Unit Price(1000)=0.0599, Unit Price(2500)=0.0484, Unit Price(4500)=0.046
LED10 LED11: "LED standard - CMS Green/Red Clear 571nm/631nm, 0606", Fabricant=Lite-On, Fournisseur=LCSC, Help URL=https://datasheet.lcsc.com/lcsc/1811100910_Lite-On-LTST-C195KGJRKT_C125104.pdf, Ref Fabricant=LTST-C195KGJRKT, Ref Fournisseur=C125104, Unit Price=0.0304, Unit Price(10)=0.0304, Unit Price(100)=0.0224, Unit Price(300)=0.021, Unit Price(1000)=0.0195, Unit Price(5000)=0.0188, Unit Price(10000)=0.0185
PT1 PT2 PT3 PT4 PT5 PT6: library part 1x_Test_point_for_beds_of_nails, Fabricant="PCB Footprint", Fournisseur="PCB Footprint", Help URL="PCB Footprint", Ref Fabricant="PCB Footprint", Ref Fournisseur="PCB Footprint"
R1 R18 R19 R23: library part R0402_0R_50V_Thick, "Resistor Thick Film SMD 0402, 0Ω, 50V, 1/16W, 1%", Fabricant=YAGEO, Fournisseur=LCSC, Help URL=https://datasheet.lcsc.com/lcsc/1809291220_YAGEO-RC0402FR-070RL_C106231.pdf, Ref Fabricant=RC0402FR-070RL, Ref Fournisseur=C106231, Unit Price=0.0006, Unit Price(10)=0.0006, Unit Price(100)=0.0006, Unit Price(1000)=0.0004
R2 R3 R13 R14 R15 R16 R17: library part R0402_1k_50V_Thick, "Resistor Thick Film SMD 0402, 1kΩ, 50V, 1/16W, 1%", Fabricant=YAGEO, Fournisseur=LCSC, Help URL=https://datasheet.lcsc.com/lcsc/1809301716_YAGEO-RC0402FR-071KL_C106235.pdf, Ref Fabricant=RC0402FR-071KL, Ref Fournisseur=C106235, Unit Price=0.0007, Unit Price(10)=0.0007, Unit Price(100)=0.0007, Unit Price(1000)=0.0006, Unit Price(10000)=0.0005
R4: library part R0402_2R_50V_Thick, "Resistor Thick Film SMD 0402, 2Ω, 50V, 1/16W, 1%", Fabricant=YAGEO, Fournisseur=LCSC, Help URL=https://datasheet.lcsc.com/lcsc/1810231325_YAGEO-RC0402JR-072RL_C137886.pdf, Ref Fabricant=RC0402JR-072RL, Ref Fournisseur=C137886, Unit Price=0.0009, Unit Price(10)=0.0009, Unit Price(100)=0.0009, Unit Price(1000)=0.0008, Unit Price(10000)=0.0007
R5: library part R0201_1k_25V_Thick, "Resistor Thick Film SMD 0201, 1kΩ, 25V, 1/20W, 1%", Fabricant=YAGEO, Fournisseur=LCSC, Help URL=https://datasheet.lcsc.com/lcsc/1810241131_YAGEO-RC0201FR-071KL_C138165.pdf, Ref Fabricant=RC0201FR-071KL, Ref Fournisseur=C138165, Unit Price=0.001, Unit Price(10)=0.001, Unit Price(100)=0.001, Unit Price(1000)=0.0007, Unit Price(10000)=0.0006
R6: library part R0201_10k_25V_Thick, "Resistor Thick Film SMD 0201,10kΩ, 25V, 1/20W, 1%", Fabricant=YAGEO, Fournisseur=LCSC, Help URL=https://datasheet.lcsc.com/lcsc/1811101938_YAGEO-RC0201FR-0710KL_C106225.pdf, Ref Fabricant=RC0201FR-0710KL, Ref Fournisseur=C106225, Unit Price=0.0011, Unit Price(10)=0.0011, Unit Price(100)=0.0011, Unit Price(1000)=0.0008, Unit Price(3000)=0.0007, Unit Price(10000)=0.0007, Unit Price(50000)=0.0006
R7: library part R0805_500mR_Current_Sense, "Resistor Current Sense SMD 0805, 500mΩ,1/8W, 1%", Fabricant=UNI-ROYAL, Fournisseur=LCSC, Help URL=https://datasheet.lcsc.com/lcsc/2206010030_UNI-ROYAL-Uniroyal-Elec-0805W8F500LT5E_C28319.pdf, Ref Fabricant=0805W8F500LT5E, Ref Fournisseur=C28319, Unit Price=0.0035, Unit Price(10)=0.0035, Unit Price(100)=0.0035, Unit Price(1000)=0.0028
R8 R9: library part R0201_5.1k_25V_Thick, "Resistor Thick Film SMD 0201, 5.1kΩ, 25V, 1/20W, 1%", Fabricant=Yageo, Fournisseur=LCSC, Help URL=https://datasheet.lcsc.com/szlcsc/1810241114_YAGEO-RC0201FR-075K1L_C274341.pdf, Ref Fabricant=RC0201FR-075K1L, Ref Fournisseur=C274341, Unit Price=0.0012, Unit Price(10)=0.0012, Unit Price(100)=0.0012, Unit Price(1000)=0.001, Unit Price(3000)=0.0009, Unit Price(50000)=0.0008
R10: library part R0402_10k_50V_Thick, "Resistor Thick Film SMD 0402, 10kΩ, 50V, 1/16W, 1%", Fabricant=YAGEO, Fournisseur=LCSC, Help URL=https://datasheet.lcsc.com/lcsc/1809301715_YAGEO-RC0402FR-0710KL_C60490.pdf, Ref Fabricant=RC0402FR-0710KL, Ref Fournisseur=C60490, Unit Price=0.0007, Unit Price(10)=0.0007, Unit Price(100)=0.0007, Unit Price(1000)=0.0005, Unit Price(50000)=0.0004
R11 R12: library part R0402_1k_50V_Thin, "Resistor Thin Film SMD 0402, 1kΩ, 50V, 1/16W, 1%", Fabricant=Yageo, Fournisseur=Mouser, Help URL=https://www.mouser.fr/datasheet/2/447/PYu-RT_1-to-0.01_RoHS_L_9-1222720.pdf, Ref Fabricant=RT0402FRE071KL, Ref Fournisseur=603-RT0402FRE071KL, Unit Price=0.087, Unit Price(10)=0.049, Unit Price(100)=0.017, Unit Price(1000)=0.012
R20 R21: library part R0402_2.2k_50V_Thick, "Resistor Thick Film SMD 0402, 2.2kΩ, 50V, 1/16W, 1%", Fabricant=Yageo, Fournisseur=Mouser, Help URL=https://www.mouser.fr/datasheet/2/447/PYu-RC_Group_51_RoHS_L_10-1527934.pdf, Ref Fabricant=RC0402FR-072K2L, Ref Fournisseur=603-RC0402FR-072K2L, Unit Price=0.087, Unit Price(10)=0.01, Unit Price(100)=0.003, Unit Price(1000)=0.003
R22: library part R0402_100k_50V_Thick_1, "Resistor Thick Film SMD 0402, 100kΩ, 50V, 63mW, 1%", Fabricant=Resistor.Today, Fournisseur=LCSC, Help URL=https://datasheet.lcsc.com/lcsc/1811091031_Resistor-Today-AECR0402F100KK9_C328296.pdf, Ref Fabricant=AECR0402F100KK9, Ref Fournisseur=C328296, Unit Price=0.0022, Unit Price(10)=0.0022, Unit Price(100)=0.0022, Unit Price(1000)=0.0018, Unit Price(3000)=0.0015, Unit Price(10000)=0.0012, Unit Price(100000)=0.0011
U1: "NTAG I²C plus: NFC Forum T2T with I²C interface, password protection and energy harvesting", Fabricant=Nexperia, Fournisseur=LCSC, Help URL=https://www.lcsc.com/product-detail/C710403.html?s_z=n_NT3H2111W0FHK, Ref Fabricant=NT3H2111W0FHK, Ref Fournisseur=C710403, Unit Price=0.7711, Unit Price(50)=0.634, Unit Price(150)=0.5663, Unit Price(500)=0.4985
U2: "AVR Microcontroller with Core Independent Peripherals and PicoPower Technology", Fabricant=MICROCHIP, Fournisseur=LCSC, Help URL=https://www.lcsc.com/datasheet/C132230.pdf?spm=wm.sxq.inf.ggs___wm.ssy.bg.0.xh&lcsc_vid=FgJXV1VSRgJaVwUHEgQNVVQEQlFXBl0FFVhdUwYFRgUxVlNRQVFWV1VXQ1hYVjsOAxUeFF5JWBYZEEoKFBINSQcJGk4%3D, Ref Fabricant=ATMEGA328PB-AU, Ref Fournisseur=C132230, Unit Price=1.8076, Unit Price(10)=1.5496, Unit Price(30)=1.3877, Unit Price(1000)=1.0721
U3: "2.1A charging 2.4A discharging Highly integrated mobile power supply SOC", Fabricant=INJOINIC, Fournisseur=LCSC, Help URL=https://datasheet.lcsc.com/lcsc/2304140030_INJOINIC-IP5306_C181692.pdf, Ref Fabricant=IP5306, Ref Fournisseur=C181692, Unit Price=0.2413, Unit Price(5)=0.2413
U4: "SC-70-5 Thermostats - Solid State RoHS", Fabricant="Texas Instruments", Fournisseur=LCSC, Help URL=https://www.lcsc.com/datasheet/C2863108.pdf, Ref Fabricant=LM20CIM7X/NOPB, Ref Fournisseur=C2863108, Unit Price=0.6424, Unit Price(10)=0.5005, Unit Price(100)=0.3651, Unit Price(1000)=0.3109
U5: "MEMS digital output motion sensor: ultra-low-power high-performance 3-axis \"femto\" accelerometer", Fabricant=ST, Fournisseur=LCSC, Help URL=https://www.lcsc.com/datasheet/C110926.pdf, Ref Fabricant=LIS2DH12TR, Ref Fournisseur=C110926, Unit Price=0.8143, Unit Price(10)=0.6796, Unit Price(100)=0.5049, Unit Price(1000)=0.4649
U6: "1A Bipolar Linear Regulator 3v3", Fabricant=HEERMICR, Fournisseur=LCSC, Help URL=https://datasheet.lcsc.com/lcsc/2210171700_HEERMICR-AMS1117-3-3_C5199435.pdf, Ref Fabricant=AMS1117-3.3, Ref Fournisseur=C5199435, Unit Price=0.0627, Unit Price(20)=0.0627, Unit Price(200)=0.0514, Unit Price(600)=0.0458, Unit Price(2500)=0.0361
X1: library part SX3B16.000F1210F30, "Crystal 16MHz ±10ppm 12pF 60Ω SMD3225-4P", Fabricant=SCTF, Fournisseur=LCSC, Help URL=https://www.lcsc.com/datasheet/C2901669.pdf?spm=wm.sxq.inf.ggs___wm.fly.bg.8.xh&lcsc_vid=FgJXV1VSRgJaVwUHEgQNVVQEQlFXBl0FFVhdUwYFRgUxVlNRQVFWVFxeQVlXXjsOAxUeFF5JWBYZEEoKFBINSQcJGk4dAgUUFAk%3D, Ref Fabricant=SX3B16.000F1210F30, Ref Fournisseur=C2901669, Unit Price=0.0547, Unit Price(50)=0.0485, Unit Price(150)=0.0454, Unit Price(500)=0.0431

## Via types
v1: diameter 0.45, hole 0.3, Top Layer (RF) to Bottom Layer (VCC), tented both sides, 143 vias
v2: diameter 2, hole 1, Top Layer (RF) to Bottom Layer (VCC), 4 vias

## Nets (pads, with @x,y where several pads share a name; then routed paths per layer and width w, separated by ;. In a path a pad name is that pad's centre, name@x,y a point inside that pad or via, vN(x,y) a via of type N, cw(c..) or ccw(c..) an arc to the next point about the centre after c; other vN are vias at no path point)
3V3_IN: C30.1 C31.1 C32.1 C33.1 R19.1 R20.1 R21.1 R22.1 U5.9 U5.10 U6.2
  other v1: 63.678,26.594 65.21,26.594 44.734,27.386 45.489,27.386 46.244,27.386 58.594,27.95 64.444,27.95 46.244,28 63.678,29.306 65.21,29.306 37.719,30.099 38.474,30.099 39.228,30.099
5V_IN: C1.1 C2.1 C9.1 C10.1 C11.1 C12.1 C20.1 C21.1 C22.1 C23.1 C24.1 C25.1 C26.1 C34.1 C35.1 DOWN.1 ENTER.1 LED1.4 LED2.4 LED3.4 LED4.4 LED5.4 LED6.4 LED7.4 LED8.4 LED9.4 LEFT.1 PT2.1 R10.1 R18.2 RIGHT.1 U2.4 U2.6 U2.18 U3.8 U4.4 U6.3 UP.1 | length 43.3
  Top Layer (RF) w0.203: C23.1@32.257,10.72 v1(32.257,11.744) ; R18.2@32.932,30.251 33.501,30.251 34.087,29.665 C26.1@34.087,21.461 v1(34.087,20.438) ; v1(34.087,5.427) C20.1@34.087,6.45 ; C22.1@39.877,10.72 v1(39.877,11.744) ; v1(41.707,5.427) C2.1@41.707,6.45 ; v1(41.707,20.438) C25.1@41.707,21.461 ; C21.1@47.853,10.72 v1(47.853,11.744) ; v1(49.683,5.427) C1.1@49.683,6.45 ; v1(49.683,20.438) C24.1@49.683,21.461 ; v1(56.946,10.951) LEFT.1@59.996,10.951 ; C34.1@58.039,23.857 v1(58.039,24.5) 58.039,25.302 58.387,25.65 U6.3@58.594,25.65 58.845,25.65 59.193,25.302 v1(59.193,24.5) C35.1@59.193,23.857 ; v1(61.264,6.76) 61.293,6.731 64.285,6.731 DOWN.1@64.314,6.76 ; v1(61.264,15.142) UP.1@64.314,15.142 ; v1(65.582,10.951) RIGHT.1@68.632,10.951 ; v1(67.614,18.698) ENTER.1@70.664,18.698 ; v1(75.99,1.056) v1(75.99,2.593) 75.99,3.541 U2.18@75.992,3.543 ; U2.6@76.792,11.943 76.793,11.944 v1(76.793,12.893) ; U2.4@78.392,11.943 U2.4@78.392,11.943 v1(78.393,12.893)
  Top Layer (RF) w0.406: R10.1@84.049,9.143 v1(84.049,9.608)
  other v1: 79.227,22.6 80.497,22.6 79.862,23.235 79.227,23.87 80.497,23.87
  other v2: 82.923,20.396
5V_USB: C4.1 C18.1 C27.1 D1.1 FB1.1 IC1.7 IC1.8 J1.A4 J1.A9 J1.B4 J1.B9
BAT: C15.1 R5.1 R7.2 U3.6
BAT+: C14.1 L1.2 R7.1
  other v1: 75.485,26.272 78.025,26.272 75.485,27.542 76.755,27.542 78.025,27.542
  other v2: 74.208,23.851